# Altium PCB imx6_cpu_board.PcbDoc (part 2 of 9)
Units mil, origin at the board's own origin, x right, y up, seen from the top; angles counter-clockwise.
Board outline 2598.43 x 2362.2 mil, 8 copper layers (Top Layer, GND1, Signal Layer 1, POWER1, POWER2, Signal Layer 2, GND2, Bottom Layer), stack 66.304 mil thick; 354 components, 422 nets, 2180 pads, 1333 vias.
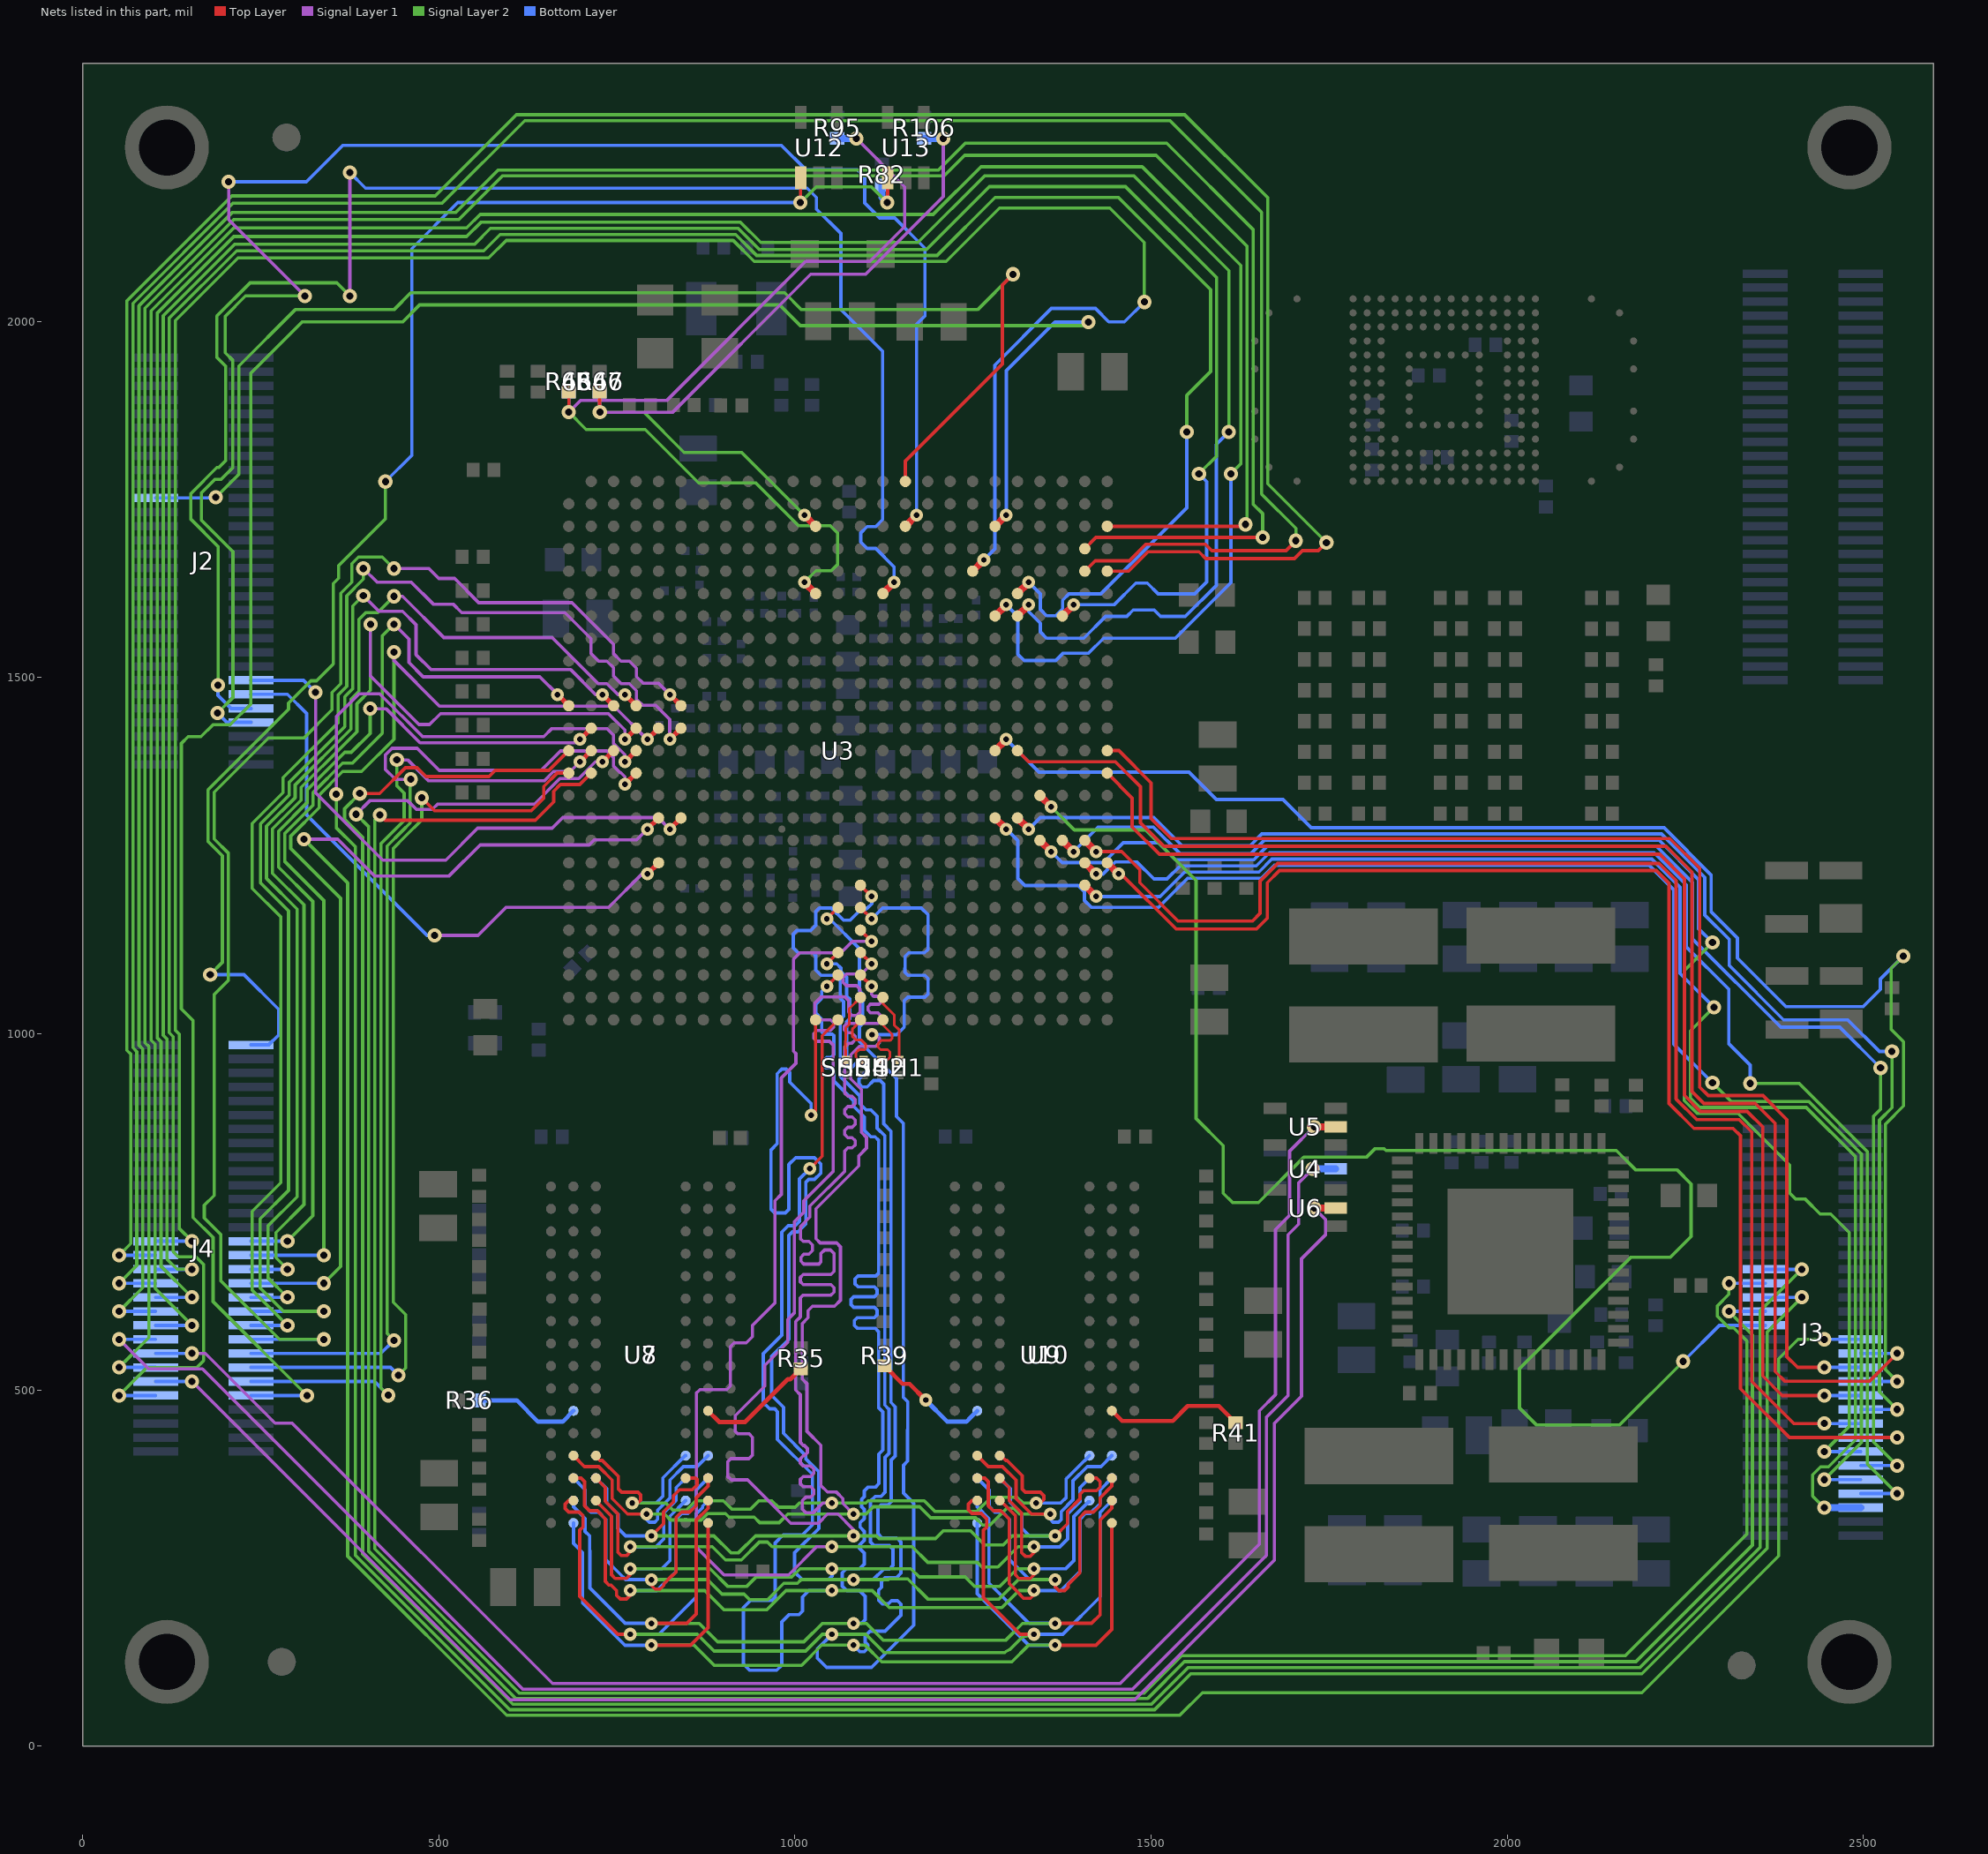
[diagram p8: the nets of this part, all layers, seen from the top]

## Part data
C1 C2 C3 C4 C5 C6 C7 C8 C9 C10 C11 C12 C13 C14 C15 C16 C17 C18 C19 C20 C21 C22 C23 C24 C25 C26 C27 C28 C29 C30 C31 C32 C33 C34 C35 C36 C37 C38 C39 C40 C41 C42 C43 C44 C45 C46 C47 C48 C49 C50 C51 C52 C53 C54 C55 C56 C57 C58 C59 C60 C61 C62 C63 C64 C65 C66 C67 C68 C69 C70 C71 C72 C73 C74 C75 C76 C77 C78 C79 C80 C81 C82 C83 C84 C85 C86 C87 C88 C89 C90 C91 C92 C93 C94 C95 C96 C97 C98 C99 C100 C101 C102 C103 C104 C105 C106 C107 C108 C109 C110 C111 C112 C113 C114 C115 C116 C117 C118 C119 C120 C121 C122 C123 C124 C125 C126 C127 C128 C129 C130 C131 C132 C133 C134 C135 C136 C137 C138 C139 C140 C141 C142 C143 C144 C145 C146 C147 C148 C149 C150 C151 C152 C153 C154 C155 C156 C157 C158 C159 C160 C161 C162 C163 C164 C165 C166 C167 C168 C169 C170 C171 C172 C173 C174 C175 C176 C177 C178 C179 C180 C181 C182 C183 C184 C185 C186 C187 C188 C189 C190 C191 C192 C193 C194 C195 C196 C197 C198 C199: library part Cap, "Capacitor"
D1: library part LN01401_1
D2: library part "Diode 11DQ03", "Schottky Rectifier"
J1 J2 J3 J4: library part "Header 30X2", "Header, 30-Pin, Dual row"
L1 L2: library part INDUCTOR, "IND PWR 1UH@100KHZ 2.65A 20% SMT"
L3 L4: library part INDUCTOR, "IND PWR 1UH@1MHZ 2A 30% SMT"
L5: library part Inductor, "Inductor"
R1 R2 R3 R4 R5 R6 R7 R8 R9 R10 R11 R12 R13 R14 R15 R16 R17 R18 R19 R20 R21 R22 R23 R24 R25 R26 R27 R28 R29 R30 R31 R32 R33 R34 R35 R36 R37 R38 R39 R40 R41 R42 R43 R44 R45 R46 R47 R48 R49 R50 R51 R52 R53 R54 R55 R56 R57 R58 R59 R60 R61 R62 R63 R64 R65 R66 R67 R68 R69 R70 R71 R72 R73 R74 R75 R76 R77 R78 R79 R80 R81 R82 R83 R84 R85 R86 R87 R88 R89 R90 R91 R92 R93 R94 R95 R96 R97 R98 R99 R100 R101 R102 R103 R104 R105 R106 R107 R108 R109 R110 R111 R112 R113 R114 R115 R116 R117 R118: library part Res3, "Resistor"
SH1 SH2 SH3 SH4: library part RES_SHORT-2, "ZERO OHM CUT TRACE 0201 PADS; NO PART TO ORDER"
U1: library part MMPF0100NPZES_56P, "IC POWER MANAGEMENT 2.8-4.5V QFN56"
U2 U14: library part STM6315
U3: library part PCIMX6Q6VV1A, "IC MCU MX6QUAD ARM CORTEX-A9 FCPBGA624"
U7 U8 U9 U10: library part 2G_DDR3_SDRAM_128MX16_96P, "IC MEM DDR3 SDRAM 2Gb 128MX16 1.35V FBGA96"
U11: library part SDIN5C2
Y1: library part XTAL_13Y_A, "XTAL 24MHZ -- 3.2X2.5MM SMT"
Y2: library part XTAL, "XTAL 32.768KHZ 12.5PF 20PPM 3.2X1.5MM SMT"

## Free pads (board coordinates)
  round 10 smd: EndPad(981.64,1287.1)
  round 118.11 hole 78.74: ""(118.11,118.11) ""(118.11,2244.09) ""(2480.32,118.11) ""(2480.32,2244.09)

## Via types
v1: diameter 18, hole 8, Top Layer to Bottom Layer, tented both sides, 768 vias
v2: diameter 20, hole 10, Top Layer to Bottom Layer, tented both sides, 565 vias

## Nets (pads, with @x,y where several pads share a name; then routed paths per layer and width w, separated by ;. In a path a pad name is that pad's centre, name@x,y a point inside that pad or via, vN(x,y) a via of type N, cw(c..) or ccw(c..) an arc to the next point about the centre after c; other vN are vias at no path point)
ACC: J3.29 U3.R22 | length 2296.9
  Top Layer w10: U3.R22@1343.84,1334.35 v1(1359.59,1318.6)
  Signal Layer 2 w4.5: v1(1359.59,1318.6) 1392.19,1286 1492,1286 1563,1215 1563,881 1601,843 1601,776.13 1614.29,762.84 1650.51,762.84 1714.23,826.56 1802.04,826.56 1813.81,838.34 1827.27,838.34 1829.61,836 2152.83,836 2179.83,809 2238,809 2258,789 2258,715.32 2229.02,686.34 2173.59,686.34 2017,529.76 2017,474.61 2040.61,451 2158,451 v2(2247,540)
  Bottom Layer w4.7: v2(2247,540) 2297.55,590.55 J3.29@2362.2,590.55
AUD3-RXD: J3.27 U3.N3 | length 3960.9
  Top Layer w7: v1(729.67,1381.59) U3.N3@745.42,1397.34
  Signal Layer 1 w4.5: v2(384,1308) 403,1327 456.25,1327 468.5,1314.75 490.73,1314.75 498.33,1322.35 634.12,1322.35 670.01,1358.25 696.39,1358.25 719.73,1381.59 v1(729.67,1381.59)
  Signal Layer 2 w4.5: v2(384,1308) 401.6,1290.4 401.6,273.24 608.24,66.6 1494.76,66.6 1546.71,118.55 2180.55,118.55 2344,282 2344,577.26 v2(2311.02,610.24)
  Bottom Layer w4.7: v2(2311.02,610.24) J3.27@2362.2,610.24
AUD3-TXC: J3.21 U3.N1 | length 4021.8
  Top Layer w4.7: v2(389,1337.19) 416.92,1337.19 453.08,1373.35 469.45,1373.35 482,1360.8 570.4,1360.8 579.1,1369.5 654.58,1369.5 U3.N1@682.43,1397.34
  Signal Layer 2 w4.5: v2(389,1337.19) 367.65,1315.84 367.65,1301.23 393,1275.88 393,269.68 603.88,58.8 1500.52,58.8 1551.82,110.1 2186.1,110.1 2355,279 2355,610.9 v2(2413.39,669.29)
  Bottom Layer w4.7: J3.21@2362.2,669.29 v2(2413.39,669.29)
AUD3-TXD: J3.23 U3.P2 | length 3902.3
  Top Layer w4.7: v2(417,1307) 424.2,1299.8 635.57,1299.8 661.11,1325.33 661.11,1340.21 670.7,1349.8 697.88,1349.8 U3.P2@713.92,1365.84
  Signal Layer 2 w4.5: v2(417,1307) 410.2,1300.2 410.2,276.8 612.6,74.4 1490.4,74.4 1543,127 2165.73,127 2336.2,297.47 2336.2,568.67 2317.75,587.12 2311.16,587.12 2294.77,603.5 2294.77,617.77 2311.02,634.02 v2(2311.02,649.61)
  Bottom Layer w4.7: v2(2311.02,649.61) J3.23@2362.2,649.61
AUD3-TXFS: J3.25 U3.N4 | length 4280
  Top Layer w7: v1(761.17,1381.59) U3.N4@776.92,1397.34
  Signal Layer 1 w4.5: v2(356,1336) 356,1445 388,1477 417.04,1477 477.2,1416.84 647.16,1416.84 658.66,1428.34 735.98,1428.34 744.92,1419.41 744.92,1407.77 761.17,1391.52 v1(761.17,1381.59)
  Signal Layer 2 w4.5: v2(356,1336) 356,1289 383,1262 383,267.51 599.51,51 1504.88,51 1555.53,101.65 2188.81,101.65 2365,277.84 2365,581.53 v2(2413.39,629.92)
  Bottom Layer w4.7: J3.25@2362.2,629.92 v2(2413.39,629.92)
AUD4-RXD: J3.56 U3.W24 | length 2057
  Top Layer w10: U3.W24@1406.84,1208.36 v1(1422.59,1192.61)
  Signal Layer 2 w4.5: v2(2290,1037) 2257,1004 2257,909.52 2270.02,896.5 2419.6,896.5 2488.49,827.61 2488.49,429.65 2450.71,391.86 2439.75,391.86 2428.63,380.75 2428.63,350.9 v2(2444.88,334.65)
  Bottom Layer w4.7: v1(1422.59,1192.61) 1512.61,1192.61 1546.9,1226.9 1651.24,1226.9 1669.34,1245 2202.84,1245 2242.5,1205.34 2242.5,1084.5 v2(2290,1037)
  Bottom Layer w10: v2(2444.88,334.65) J3.56@2496.06,334.65
AUD4-TXC: J3.50 U3.U22 | length 2024.7
  Top Layer w10: U3.U22@1343.84,1271.36 v1(1359.59,1255.61)
  Signal Layer 2 w4.5: v2(2524,951.91) 2524,894 2513.99,883.99 2513.99,426.95 v2(2547.24,393.7)
  Bottom Layer w4.7: v1(1359.59,1255.61) 1374.94,1240.26 1433.26,1240.26 1461,1268 1510,1268 1533.7,1244.3 1644.03,1244.3 1662.63,1262.9 2209.4,1262.9 2259.9,1212.4 2259.9,1133.05 2383.91,1009.04 2466.87,1009.04 v2(2524,951.91) ; J3.50@2496.06,393.7 v2(2547.24,393.7)
AUD4-TXD: J3.52 U3.T20 | length 2155.3
  Top Layer w10: U3.T20@1280.85,1302.85 v1(1296.6,1287.1)
  Signal Layer 2 w4.5: v2(2288,931) 2314,905 2423.05,905 2496.99,831.06 2496.99,426.13 v2(2444.88,374.02)
  Bottom Layer w4.7: v1(1296.6,1287.1) 1312.75,1270.95 1312.75,1217.75 1322.5,1208 1397.4,1208 1406.44,1198.97 1406.44,1187.05 1416.23,1177.26 1510.29,1177.26 1551.23,1218.2 1654.84,1218.2 1672.94,1236.3 2199.3,1236.3 2233.8,1201.8 2233.8,985.2 v2(2288,931) ; v2(2444.88,374.02) J3.52@2496.06,374.02
AUD4-TXFS: J3.54 U3.V24 | length 1970.6
  Top Layer w10: U3.V24@1406.84,1239.86 v1(1422.59,1224.11)
  Signal Layer 2 w4.5: v2(2341,930.18) 2409.82,930.18 2505.49,834.51 2505.49,396.08 v2(2547.24,354.33)
  Bottom Layer w4.7: v1(1422.59,1224.11) 1432.37,1224.11 1449.26,1241 1480,1241 1503.88,1217.12 1522.14,1217.12 1540.62,1235.6 1647.63,1235.6 1666.23,1254.2 2205.87,1254.2 2251.2,1208.87 2251.2,1122 2311.02,1062.18 2311.02,985.75 2341,955.77 v2(2341,930.18) ; J3.54@2496.06,354.33 v2(2547.24,354.33)
AUD5-RXD: J3.48 U3.U23 | length 1999
  Top Layer w10: U3.U23@1375.34,1271.36 v1(1391.09,1255.61)
  Signal Layer 2 w4.5: v2(2288,1128) 2248.5,1088.5 2248.5,906 2266.5,888 2324,888 2396.45,815.55 2396.45,776.27 2405,767.72 2418.28,767.72 2439,747 2454,747 2479.99,721.01 ; v2(2444.88,413.39) 2479.99,448.5 2479.99,721.01 ; 2480.04,720.96 2479.99,721.01
  Bottom Layer w4.7: v1(1391.09,1255.61) 1425.48,1290 1503,1290 1540,1253 1640.43,1253 1659.03,1271.6 2212.93,1271.6 2268.6,1215.93 2268.6,1147.4 v2(2288,1128) ; v2(2444.88,413.39) J3.48@2496.06,413.39
AUD5-TXC: J3.42 U3.T21 | length 2014.2
  Top Layer w10: U3.T21@1312.35,1302.85 v1(1328.1,1287.1)
  Signal Layer 2 w4.5: v2(2540,975) 2540.2,974.8 2540.2,896.2 2522.49,878.49 2522.49,497.19 v2(2547.24,472.44)
  Bottom Layer w4.7: v1(1328.1,1287.1) 1344.25,1303.25 1503.75,1303.25 1543,1264 1639.12,1264 1655.42,1280.3 2216.47,1280.3 2277.3,1219.47 2277.3,1166.34 2311.64,1132 2311.64,1095.55 2387.8,1019.39 2478,1019.39 2522.39,975 v2(2540,975) ; J3.42@2496.06,472.44 v2(2547.24,472.44)
AUD5-TXD: J3.44 U3.U24 | length 1917.3
  Top Layer w4.7: v1(1422.59,1255.61) 1458.72,1255.61 1484,1230.33 1484,1212 1538,1158 1642,1158 1653,1169 1653,1214.3 1677.7,1239 2213,1239 2237,1215 2237,908.4 2265.9,879.5 2325.5,879.5 2343,862 2343,512 2402.24,452.76 v2(2444.88,452.76)
  Top Layer w10: U3.U24@1406.84,1271.36 v1(1422.59,1255.61)
  Bottom Layer w4.7: v2(2444.88,452.76) J3.44@2496.06,452.76
AUD5-TXFS: J3.46 U3.V25 | length 1980.5
  Top Layer w4.7: v1(1454.08,1224.11) 1457.89,1224.11 1535,1147 1648,1147 1663,1162 1663,1212 1680,1229 2209,1229 2227,1211 2227,902 2261.93,867.07 2316.93,867.07 2327.37,856.63 2327.37,501.63 2395.93,433.07 v2(2547.24,433.07)
  Top Layer w10: U3.V25@1438.33,1239.86 v1(1454.08,1224.11)
  Bottom Layer w4.7: J3.46@2496.06,433.07 v2(2547.24,433.07)
AUD6-RXD: J3.40 U3.P25 | length 1826.3
  Top Layer w4.7: U3.P25@1438.33,1365.84 1473.38,1330.79 1473.38,1290 1511.6,1251.78 2214,1251.78 2248.5,1217.28 2248.5,913.5 2271,891 2336.69,891 2358.5,869.19 2358.5,519.5 2385.87,492.13 v2(2444.88,492.13)
  Bottom Layer w4.7: v2(2444.88,492.13) J3.40@2496.06,492.13
AUD6-TXC: J3.34 U3.N21 | length 2083.2
  Top Layer w4.7: U3.N21@1312.35,1397.34 1328.1,1381.59 1450,1381.59 1485,1346.59 1485,1296 1518,1263 2223,1263 2259.1,1226.9 2259.1,918.68 2275.78,902 2348,902 2376,874 2376,525.84 2389.84,512 2508.06,512 v2(2547.24,551.18)
  Bottom Layer w4.7: J3.34@2496.06,551.18 v2(2547.24,551.18)
AUD6-TXD: J3.36 U3.N25 | length 1820.5
  Top Layer w4.7: U3.N25@1438.33,1397.34 1454.61,1397.34 1500,1351.95 1500,1302.14 1528.14,1274 2228,1274 2270,1232 2270,925 2282,913 2359,913 2392.5,879.5 2392.5,546.5 2407.5,531.5 v2(2444.88,531.5)
  Bottom Layer w4.7: v2(2444.88,531.5) J3.36@2496.06,531.5
AUD6-TXFS: J3.38 U3.N20 | length 2201.7
  Top Layer w10: U3.N20@1280.85,1397.34 v1(1296.6,1413.09)
  Signal Layer 2 w4.5: v2(2547.24,511.81) 2530.99,528.06 2530.99,873.35 2556.2,898.55 2556.2,988.6 2538.8,1006 2538.8,1091.8 v2(2556,1109)
  Bottom Layer w4.7: v1(1296.6,1413.09) 1342.69,1367 1553,1367 1591.33,1328.67 1685.15,1328.67 1724.82,1289 2220,1289 2286,1223 2286,1171.34 2323,1134.34 2323,1106 2391,1038 2499.49,1038 2523.65,1062.15 2523.65,1076.65 v2(2556,1109) ; J3.38@2496.06,511.81 v2(2547.24,511.81)
AUD-MCLK: J3.32 U3.T5 | length 4182
  Top Layer w7: v1(792.66,1287.1) U3.T5@808.41,1302.85
  Signal Layer 1 w4.5: v2(310.58,1273) 358,1273 409.5,1221.5 514.49,1221.5 557.92,1264.93 711.08,1264.93 718,1271.85 777.41,1271.85 v1(792.66,1287.1)
  Signal Layer 2 w4.5: v2(310.58,1273) 372,1211.58 372,266.49 595.29,43.2 1540.2,43.2 1572,75 2189,75 2381,267 2381,543.7 2408.17,570.87 v2(2444.88,570.87)
  Bottom Layer w4.7: v2(2444.88,570.87) J3.32@2496.06,570.87
BM-SEL: J4.2 R82.2 U12.1 U13.1 | length 2164.7
  Top Layer w4.7: v2(1007.5,2166.6) 1007.88,2166.98 U12.1@1007.88,2201.29 ; v2(1129.55,2166.6) 1129.92,2166.98 U13.1@1129.92,2201.29
  Signal Layer 2 w4.5: v2(179,1083) 196.12,1100.12 196.12,1249.7 176,1269.82 176,1342.29 289,1455.29 289,1464.22 320.18,1495.4 328.4,1495.4 352,1519 352,1632.04 359.45,1639.49 359.45,1657.05 425,1722.6 v2(425,1775) ; v2(1007.5,2166.6) 1029.45,2188.55 1107.6,2188.55 v2(1129.55,2166.6)
  Bottom Layer w4.7: v2(179,1083) 226.34,1083 275,1034.34 275,998.19 261.06,984.25 J4.2@236.22,984.25 ; v2(425,1775) 462,1812 462,2102 526.6,2166.6 v2(1007.5,2166.6)
  Bottom Layer w10: R82.2@1122,2191.48 1122,2174.15 v2(1129.55,2166.6)
BOOT-MODE0: R47.1 R66.2 R106.1 U3.C12 | length 1141.9
  Top Layer w4.5: v2@725.78,1872.67 v2(726,1872.45)
  Top Layer w4.7: v2@725.78,1872.67 R47.1@725.78,1900.59
  Top Layer w10: v1(1013.13,1728.05) U3.C12@1028.88,1712.3
  Signal Layer 1 w4.5: v2(726,1872.45) 828.5,1872.45 1022.05,2066 1099.08,2066 1208.11,2175.03 v2(1208.11,2256.77)
  Signal Layer 2 w4.5: v2(726,1872.45) 787.91,1872.45 844.36,1816 925.18,1816 v1(1013.13,1728.05)
  Bottom Layer w4.7: R66.2@725.78,1900.59 725.78,1872.67 v2(726,1872.45)
  Bottom Layer w10: R106.1@1181.12,2256.77 v2(1208.11,2256.77)
BOOT-MODE1: R46.1 R65.2 R95.1 U3.F12 | length 1385.9
  Top Layer w4.5: v2(682.43,1872.45) v2@682.48,1872.5
  Top Layer w4.7: v2@682.48,1872.5 R46.1@682.48,1900.59
  Top Layer w10: v1(1013.13,1633.56) U3.F12@1028.88,1617.81
  Signal Layer 1 w4.5: v2(682.43,1872.45) 698.73,1888.75 819.75,1888.75 1015,2084 1104.85,2084 1154,2133.15 1154,2188.83 v2(1086.07,2256.77)
  Signal Layer 2 w4.5: v2(682.43,1872.45) 706.88,1848 789.8,1848 864.8,1773 945,1773 1005.15,1712.85 1049.82,1712.85 1059.98,1702.69 1059.98,1658.92 1050.93,1649.86 1029.43,1649.86 v1(1013.13,1633.56)
  Bottom Layer w4.7: v2(682.43,1872.45) 682.48,1872.5 R65.2@682.48,1900.59
  Bottom Layer w10: R95.1@1059.07,2256.77 v2(1086.07,2256.77)
CAN-RX: J2.50 U3.V5 | length 838
  Top Layer w7: v1(792.66,1224.11) U3.V5@808.41,1239.86
  Signal Layer 1 w4.5: v2(494,1138) 555,1138 594.37,1177.37 738.37,1177.37 785.11,1224.11 v1(792.66,1224.11)
  Bottom Layer w4.7: J2.50@236.22,1476.38 287.4,1476.38 314.3,1449.48 314.3,1307 483.3,1138 v2(494,1138)
CAN-STBY: J2.52 U3.F15 | length 2333
  Top Layer w10: U3.F15@1123.37,1617.81 v1(1139.12,1633.56)
  Signal Layer 1 w4.5: v2(375,2035.65) v2(375,2209)
  Signal Layer 2 w4.5: v2(190,1489) 190,1684 152,1722 152,1758.44 188.33,1794.77 191.23,1794.77 200.75,1804.29 200.75,1937 188.5,1949.25 188.5,2007.45 235.05,2054 356.65,2054 v2(375,2035.65)
  Bottom Layer w4.7: v2(190,1489) 190,1475 208.62,1456.38 J2.52@236.54,1456.38 ; v2(375,2209) 397.1,2186.9 1017.1,2186.9 1030.13,2173.87 1030.13,2157.64 1064.37,2123.4 1064.37,2016.63 1122.98,1958.02 1122.98,1721.69 1113.19,1711.9 1101.27,1711.9 1092.28,1702.91 1092.28,1690.19 1101.27,1681.2 1113.2,1681.2 1139.12,1655.28 v1(1139.12,1633.56)
CAN-TX: J2.48 U3.T6 | length 828.9
  Top Layer w7: v1(824.16,1287.1) U3.T6@839.91,1302.85
  Signal Layer 1 w4.5: v2(326.91,1479.15) 326.91,1337.95 421.11,1243.75 509.75,1243.75 554.5,1288.5 659.15,1288.5 674,1303.35 807.91,1303.35 v1(824.16,1287.1)
  Bottom Layer w4.7: J2.48@236.22,1496.06 310,1496.06 v2(326.91,1479.15)
CAN-TXEN: J2.54 U3.C16 | length 2474.8
  Top Layer w10: U3.C16@1154.87,1712.3 v1(1170.62,1728.05)
  Signal Layer 1 w4.5: v2(204.88,2196) 204.88,2142.77 v2(312,2035.65)
  Signal Layer 2 w4.5: v2(189.07,1450) 211,1471.93 211,1676.64 166.46,1721.18 166.46,1758.96 185.5,1778 194.18,1778 210.85,1794.67 210.85,1945.15 200,1956 200,2007 228.65,2035.65 v2(312,2035.65)
  Bottom Layer w4.7: v2(189.07,1450) 202.06,1437.01 J2.54@236.22,1437.01 ; v2(204.88,2196) 314,2196 365,2247 980.88,2247 1014.88,2213 1087,2213 1098,2202 1098,2166 1119,2145 1140,2145 1182.38,2102.62 1182.38,2007.65 1170.62,1995.89 v1(1170.62,1728.05)
CAP-TCH-INT0: J2.21 U3.A16 | length 1795.7
  Top Layer w4.7: U3.A16@1154.87,1775.29 1154.87,1803.75 1291,1939.89 1291,2051.03 v2(1306,2066.03)
  Signal Layer 2 w4.5: v2(187,1753) 219.3,1785.3 219.3,1937.3 298.37,2016.37 437,2016.37 460.63,2040 985.37,2040 1009,2016.37 1256.34,2016.37 v2(1306,2066.03)
  Bottom Layer w4.7: J2.21@102.36,1751.97 185.97,1751.97 v2(187,1753)
CSI0-DAT12: J4.30 U3.M2 | length 1230.7
  Top Layer w7: v1(698.17,1413.09) U3.M2@713.92,1428.84
  Signal Layer 1 w4.5: v2(403.5,1456.25) 425.77,1456.25 473.68,1408.34 693.42,1408.34 v1(698.17,1413.09)
  Signal Layer 2 w4.5: v2(287.4,708.66) 323,744.26 323,1185.76 275,1233.76 275,1284.23 315.11,1324.34 315.11,1342.13 367.98,1395 377,1395 403.5,1421.5 v2(403.5,1456.25)
  Bottom Layer w4.7: J4.30@236.22,708.66 v2(287.4,708.66)
CSI0-DAT13: J4.32 U3.L1 | length 1394.8
  Top Layer w7: v1(666.68,1476.08) U3.L1@682.43,1460.33
  Signal Layer 1 w4.5: v2(437,1574.8) 458,1553.8 458,1521 478,1501 641.76,1501 v1(666.68,1476.08)
  Signal Layer 2 w4.5: v2(338.58,688.98) 338.58,1186.92 283.5,1242 283.5,1280.78 323.56,1320.84 323.56,1338.56 364.84,1379.84 378.84,1379.84 420.75,1421.75 420.75,1558.55 v2(437,1574.8)
  Bottom Layer w4.7: J4.32@236.22,688.98 v2(338.58,688.98)
CSI0-DAT14: J4.34 U3.M4 | length 1564.4
  Top Layer w7: v1(761.17,1413.09) U3.M4@776.92,1428.84
  Signal Layer 1 w4.5: v2(404,1574.8) 404,1502.06 472.06,1434 487,1434 502.34,1449.34 738.04,1449.34 761.17,1426.21 v1(761.17,1413.09)
  Signal Layer 2 w4.5: v2(287.4,669.29) 271.2,685.49 271.2,720.8 310.58,760.18 310.58,1180.92 266.5,1225 266.5,1287.68 306.66,1327.84 306.66,1345.7 364.46,1403.5 364.54,1403.5 384.98,1423.94 384.98,1463.04 404,1482.06 v2(404,1574.8)
  Bottom Layer w4.7: J4.34@236.22,669.29 v2(287.4,669.29)
CSI0-DAT15: J4.36 U3.M5 | length 1538
  Top Layer w7: v1(792.66,1413.09) U3.M5@808.41,1428.84
  Signal Layer 1 w4.5: v2(437,1535.43) 437,1523.76 500.92,1459.84 745.91,1459.84 v1(792.66,1413.09)
  Signal Layer 2 w4.5: v2(338.58,649.61) 362,673.02 362,1190 292,1260 292,1277.33 332.01,1317.34 332.01,1334.99 365.02,1368 391.61,1368 437,1413.39 v2(437,1535.43)
  Bottom Layer w4.7: J4.36@236.22,649.61 v2(338.58,649.61)
CSI0-DAT16: J4.38 U3.L4 | length 1568.9
  Top Layer w7: v1(761.17,1476.08) U3.L4@776.92,1460.33
  Signal Layer 1 w4.5: v2(437,1614) 449,1614 507,1556 659,1556 723.67,1491.33 735.98,1491.33 751.23,1476.08 v1(761.17,1476.08)
  Signal Layer 2 w4.5: v2(287.4,629.92) 260,657.32 260,730 301,771 301,1175 258,1218 258,1291.13 298.21,1331.34 298.21,1349.27 376.48,1427.54 376.48,1469.42 387.75,1480.69 387.75,1581.53 397.27,1591.05 414.05,1591.05 v2(437,1614)
  Bottom Layer w4.7: J4.38@236.22,629.92 v2(287.4,629.92)
CSI0-DAT17: J4.40 U3.L3 | length 1710.4
  Top Layer w7: v1(729.67,1476.08) U3.L3@745.42,1460.33
  Signal Layer 1 w4.5: v2(394,1615) 416,1593 449,1593 468,1574 468,1532 488.67,1511.33 684.67,1511.33 719.92,1476.08 v1(729.67,1476.08)
  Signal Layer 2 w4.5: v2(338.58,610.24) 281.76,610.24 249,643 249,740 289,780 289,1172.18 249.5,1211.68 249.5,1294.58 289.76,1334.84 289.76,1352.84 367.98,1431.06 367.98,1472.94 379.25,1484.21 379.25,1600.25 v2(394,1615)
  Bottom Layer w4.7: J4.40@236.22,610.24 v2(338.58,610.24)
CSI0-DAT18: J4.42 U3.M6 | length 1825.9
  Top Layer w7: v1(824.16,1413.09) U3.M6@839.91,1428.84
  Signal Layer 1 w4.5: v2(394,1653) 413,1634 461,1634 492,1603 520,1603 531.93,1591.07 676.93,1591.07 713.42,1554.58 713.42,1533.76 724.34,1522.83 735.98,1522.83 745,1513.82 745,1502.19 755.85,1491.33 767.48,1491.33 777.41,1481.41 777.41,1469.76 786.34,1460.83 804.4,1460.83 824.16,1441.07 v1(824.16,1413.09)
  Signal Layer 2 w4.5: v2(287.4,590.55) 238,639.95 238,750.65 278,790.65 278,1164 238,1204 238,1295.03 281.31,1338.34 281.31,1359.28 358.5,1436.47 358.5,1475.48 370.75,1487.73 370.75,1614.73 394,1637.98 v2(394,1653)
  Bottom Layer w4.7: J4.42@236.22,590.55 v2(287.4,590.55)
CSI0-DAT19: J4.44 U3.L6 | length 1996.1
  Top Layer w7: v1(824.16,1476.08) U3.L6@839.91,1460.33
  Signal Layer 1 w4.5: v2(437,1653) 486,1653 500,1639 522,1639 556,1605 687,1605 744.92,1547.08 744.92,1533.76 755.84,1522.83 767.48,1522.83 777.41,1512.91 777.41,1501.25 786.51,1492.15 808.1,1492.15 v1(824.16,1476.08)
  Signal Layer 2 w4.5: v2(338.58,570.87) 276.13,570.87 194,653 194,718.02 170.72,741.3 170.72,759.15 184.5,772.93 184.5,1055 204.62,1075.12 204.62,1253.22 184.5,1273.34 184.5,1338.84 260.95,1415.28 310.58,1415.28 350,1454.7 350,1479 362.25,1491.25 362.25,1618.25 377.75,1633.75 377.75,1659.73 387.27,1669.25 420.75,1669.25 v2(437,1653)
  Bottom Layer w4.7: J4.44@236.22,570.87 v2(338.58,570.87)
CSI0-HSYNCH: J4.46 U3.P4 | length 1494.3
  Top Layer w7: v1(761.17,1350.09) U3.P4@776.92,1365.84
  Signal Layer 1 w4.5: v2(460.52,1357) 439,1357 424.75,1371.25 424.75,1391.12 434.27,1400.64 469.36,1400.64 500.4,1369.6 643.64,1369.6 670.88,1396.84 735.98,1396.84 744.92,1387.91 744.92,1376.27 754.85,1366.34 755.52,1366.34 761.17,1360.69 v1(761.17,1350.09)
  Signal Layer 2 w4.5: v2(437,569.59) 427.3,579.29 427.3,1263.3 448.75,1284.75 459.75,1295.73 459.75,1356.23 v2(460.52,1357)
  Bottom Layer w4.7: J4.46@236.22,551.18 418.59,551.18 v2(437,569.59)
CSI0-PIXCLK: J4.48 U3.P1 | length 1295.2
  Top Layer w4.7: v2(476,1331) 493.98,1313.02 629.6,1313.02 647.29,1330.71 647.29,1346.99 666.14,1365.84 U3.P1@682.43,1365.84
  Signal Layer 2 w4.5: v2(443,520.45) 453.25,530.7 453.25,605.75 436,623 436,1259.98 452.27,1276.25 ; 452.29,1276.25 476,1299.96 v2(476,1331)
  Bottom Layer w4.7: J4.48@236.22,531.5 431.96,531.5 v2(443,520.45)
CSI0-RST-B: J4.52 U3.C20 | length 3250
  Top Layer w10: U3.C20@1280.85,1712.3 v1(1296.6,1728.05)
  Signal Layer 2 w4.5: v2(314.75,492.13) 183,623.88 183,714 155,742 155,1018.51 138.5,1035.01 138.5,1407.34 148,1416.84 165.99,1416.84 182.95,1433.8 207,1433.8 236.2,1463 236.2,1927.38 308.2,1999.37 449.37,1999.37 473,2023 978.33,2023 1007.37,1993.96 1406.96,1993.96 v2(1412,1999)
  Bottom Layer w4.7: J4.52@236.22,492.13 v2(314.75,492.13) ; v1(1296.6,1728.05) 1296.6,1930.6 1365,1999 v2(1412,1999)
CSI0-VSYNCH: J4.50 U3.N2 | length 1417.5
  Top Layer w7: v1(698.17,1381.59) U3.N2@713.92,1397.34
  Signal Layer 1 w4.5: v2(441,1384.39) 456.11,1384.39 485.65,1354.85 647.85,1354.85 661,1368 684.57,1368 v1(698.17,1381.59)
  Signal Layer 2 w4.5: v2(429,492.38) 418.8,502.58 418.8,1266.82 451.25,1299.27 451.25,1337.75 441,1348 v2(441,1384.39)
  Bottom Layer w4.7: J4.50@236.22,511.81 409.56,511.81 v2(429,492.38)
CSI1-DAT12: J4.33 U3.G23 | length 3727.1
  Top Layer w10: U3.G23@1375.34,1586.32 v1(1391.08,1602.07)
  Signal Layer 2 w4.5: v2(153.54,669.29) 132.71,669.29 118.5,683.5 118.5,992.35 113,997.85 113,2007.9 213.1,2108 550,2108 572.5,2130.5 920.08,2130.5 949.58,2101 1185,2101 1273,2189 1464,2189 1592,2061 1592,1811 v2(1567,1786)
  Bottom Layer w4.7: J4.33@102.36,669.29 v2(153.54,669.29) ; v1(1391.08,1602.07) 1448,1602.07 1478.39,1632.46 1494.66,1632.46 1509.77,1617.35 1561.35,1617.35 1578,1634 1578,1775 v2(1567,1786)
CSI1-DAT13: J4.31 U3.E25 | length 4008.2
  Top Layer w4.7: U3.E25@1438.33,1649.31 1468.38,1649.31 1495.6,1676.53 1567,1676.53 1576.53,1667 1701.31,1667 1712.32,1678.01 1734.56,1678.01 v2(1746,1689.45)
  Signal Layer 2 w4.5: v2(51.18,688.98) 67.43,705.23 67.43,971.3 62,976.73 62,2028.6 209.4,2176 495,2176 609,2290 1547,2290 1663.5,2173.5 1663.5,1771.95 v2(1746,1689.45)
  Bottom Layer w4.7: v2(51.18,688.98) J4.31@102.36,688.98
CSI1-DAT14: J4.35 U3.E24 | length 3985.6
  Top Layer w4.7: U3.E24@1406.84,1649.31 1421.53,1664 1469.57,1664 1492.57,1687 1576,1687 1585,1678 1689.19,1678 v2(1703.19,1692)
  Signal Layer 2 w4.5: v2(51.18,649.61) 75.93,674.36 75.93,974.82 70.5,980.25 70.5,2025.15 211.35,2166 505,2166 620.55,2281.55 1526.45,2281.55 1655,2153 1655,1757.47 1703.19,1709.28 v2(1703.19,1692)
  Bottom Layer w4.7: v2(51.18,649.61) J4.35@102.36,649.61
CSI1-DAT15: J4.41 U3.G20 | length 4068
  Top Layer w10: U3.G20@1280.85,1586.32 v1(1296.6,1602.07)
  Signal Layer 2 w4.5: v2(153.54,590.55) 101.5,642.59 101.5,985.31 96,990.81 96,2014.8 212.2,2131 538.98,2131 557.98,2150 1194,2150 1261,2217 1487.34,2217 1626,2078.34 1626,1800 v2(1612,1786)
  Bottom Layer w4.7: J4.41@102.36,590.55 v2(153.54,590.55) ; v1(1296.6,1602.07) 1312.74,1585.93 1312.74,1532.71 1321.73,1523.72 1365.95,1523.72 1376.41,1534.19 1412.22,1534.19 1433.26,1555.22 1533.99,1555.22 1612,1633.23 v2(1612,1786)
CSI1-DAT16: J4.37 U3.G21 | length 3920.5
  Top Layer w10: U3.G21@1312.35,1586.32 v1(1328.09,1602.07)
  Signal Layer 2 w4.5: v2(153.54,629.92) 110,673.46 110,988.83 104.5,994.33 104.5,2011.35 212.15,2119 539,2119 559,2139 923.53,2139 951.86,2110.67 1172.67,2110.67 1266,2204 1476.15,2204 1609,2071.15 v2(1609,1844.81)
  Bottom Layer w4.7: J4.37@102.36,629.92 v2(153.54,629.92) ; v1(1328.09,1602.07) 1328.09,1592.28 1344.24,1576.13 1344.24,1564.21 1353.23,1555.22 1405.3,1555.22 1436,1585.92 1465.92,1585.92 1474.72,1594.72 1504.28,1594.72 1513.08,1585.92 1547.92,1585.92 1591.33,1629.33 1591.33,1827.14 v2(1609,1844.81)
CSI1-DAT17: J4.39 U3.D24 | length 3881.7
  Top Layer w4.7: U3.D24@1406.84,1680.8 1422.59,1696.55 v2(1656.55,1696.55)
  Signal Layer 2 w4.5: v2(51.18,610.24) 84.43,643.49 84.43,978.34 79,983.77 79,2021.7 210.3,2153 524,2153 583.5,2212.5 1201.5,2212.5 1239,2250 1522,2250 1643,2129 1643,1743.55 1656.55,1730 v2(1656.55,1696.55)
  Bottom Layer w4.7: v2(51.18,610.24) J4.39@102.36,610.24
CSI1-DAT18: J4.47 U3.C25 | length 3833
  Top Layer w4.7: U3.C25@1438.33,1712.3 1630,1712.3 v2(1632.59,1714.9)
  Signal Layer 2 w4.5: v2(51.18,531.5) 93,573.31 93,981.79 87.5,987.29 87.5,2018.25 212.25,2143 528,2143 589,2204 1209,2204 1238,2233 1507,2233 1634.5,2105.5 1634.5,1716.8 v2(1632.59,1714.9)
  Bottom Layer w4.7: v2(51.18,531.5) J4.47@102.36,531.5
CSI1-DAT19: J4.43 U4.2 | length 2544.6
  Signal Layer 1 w4.5: v2(51.18,570.87) 92.63,529.41 168.08,529.41 617.49,80 1474,80 1662,268 1662,462 1692,492 1692,717.75 1707,732.75 1707,790.64 v2(1726.68,810.31)
  Bottom Layer w4.7: v2(51.18,570.87) J4.43@102.36,570.87
  Bottom Layer w10: v2(1726.68,810.31) U4.2@1758.99,810.31
CSI1-HSYNCH: J4.45 U5.2 | length 2470.7
  Top Layer w10: v2(1728.74,869.38) U5.2@1758.99,869.38
  Signal Layer 1 w4.5: v2(153.54,551.18) 172.16,551.18 270,453.34 294.05,453.34 659.59,87.8 1456.48,87.8 1652,283.32 1652,470.76 1674.58,493.34 1674.58,725 1694.4,744.82 1694.4,835.04 v2(1728.74,869.38)
  Bottom Layer w4.7: J4.45@102.36,551.18 v2(153.54,551.18)
CSI1-PIXCLK: J4.51 U3.F21 | length 3964.7
  Top Layer w10: U3.F21@1312.35,1617.81 v1(1328.1,1633.56)
  Signal Layer 2 w4.5: v2(51.18,492.13) 90.55,531.5 131.1,531.5 160.29,531.5 169.79,541 169.79,676.02 158.88,686.93 134.07,686.93 127,694 127,995.87 121.5,1001.37 121.5,2004.45 216.05,2099 563,2099 586,2122 916.63,2122 946.13,2092.5 1199.5,2092.5 1281,2174 1454,2174 1583.5,2044.5 1583.5,1929.5 1550,1896 v2(1550,1844.81)
  Bottom Layer w4.7: v2(51.18,492.13) J4.51@102.36,492.13 ; v1(1328.1,1633.56) 1344.24,1617.42 1344.24,1595.71 1353.23,1586.72 1365.95,1586.72 1375.73,1596.5 1375.73,1608.43 1384.72,1617.42 1429.42,1617.42 1550,1738 v2(1550,1844.81)
CSI1-RST-B: J4.29 U3.E19 | length 3471.3
  Top Layer w10: U3.E19@1249.36,1649.31 v1(1265.11,1665.06)
  Signal Layer 2 w4.5: v2(153.54,708.66) 135.5,726.7 135.5,999.39 130,1004.89 130,1019 130,2001 218,2089 570,2089 594.5,2113.5 913.18,2113.5 942.68,2084 1212,2084 1287,2159 1442,2159 1490.38,2110.62 v2(1490.38,2027.16)
  Bottom Layer w4.7: J4.29@102.36,708.66 v2(153.54,708.66) ; v1(1265.11,1665.06) 1280.46,1680.41 1280.46,1938.46 1360,2018 1421.81,2018 1440.57,1999.23 1462.45,1999.23 v2(1490.38,2027.16)
CSI1-VSYNCH: J4.49 U6.2 | length 2397.9
  Top Layer w10: v2(1728.74,755.21) U6.2@1758.99,755.21
  Signal Layer 1 w4.5: v2(153.54,511.81) 600.35,65 1477,65 1673,261 1673,453 1711,491 1711,684 1744.99,717.99 1744.99,738.96 v2(1728.74,755.21)
  Bottom Layer w4.7: J4.49@102.36,511.81 v2(153.54,511.81)
DDR_SDCLK0: SH1.1 U3.AD15 | length 97.6
  Top Layer w3.7: U3.AD15@1123.37,1050.88 1123.37,1042.35 1139.12,1026.6 1139.12,1012.34 1146.38,1005.08 SH1.1@1146.38,962.85
DDR_SDCLK0_B: SH2.1 U3.AE15 | length 99.9
  Top Layer w3.7: SH2.1@1121.38,962.85 1129.38,962.85 1133.14,966.61 1133.14,974.58 1130.08,977.64 1120.1,977.64 1116.38,981.36 1116.38,985.88 1120.84,990.34 1133.38,990.34 1136.38,993.34 1136.38,999.34 1123.37,1012.35 U3.AE15@1123.37,1019.39
DDR_SDCLK1: SH3.1 U3.AD14 | length 97.4
  Top Layer w3.7: SH3.1@1071.38,962.85 1071.38,977.34 1070.38,978.34 1070.38,989.34 1071.38,990.34 1071.38,1008.12 1076.13,1012.86 1076.13,1035.14 U3.AD14@1091.88,1050.88
DDR_SDCLK1_B: SH4.1 U3.AE14 | length 92.3
  Top Layer w3.7: U3.AE14@1091.88,1019.39 1091.88,1018.17 1083.83,1010.12 1083.83,1009.66 1080.38,1006.21 1080.38,996.34 1085.38,991.34 1092.72,991.34 1099.38,984.68 1099.38,979.34 1097.38,977.34 1089.62,977.34 1085.38,973.1 1085.38,967.09 1089.62,962.85 SH4.1@1096.38,962.85
DRAM0_ZQ: R35.2 U8.L8 | length 167.6
  Top Layer w6: U8.L8@877.93,470.61 893.69,454.85 929.88,454.85 989.95,514.92 993.44,514.92 R35.2@1008.1,529.58
DRAM1_ZQ: R36.2 U7.L8 | length 150.6
  Bottom Layer w6: R36.2@557.14,485.34 609.38,485.34 639.38,455.34 673.7,455.34 U7.L8@688.96,470.61
DRAM2_ZQ: R41.2 U10.L8 | length 197.7
  Top Layer w6: U10.L8@1444.86,470.61 1459.08,456.4 1530.34,456.4 1551.29,477.34 1595.14,477.34 R41.2@1618.38,454.1
DRAM3_ZQ: R39.2 U9.L8 | length 168.9
  Top Layer w6: R39.2@1125.7,533.58 1150.94,508.34 1160.84,508.34 v1(1183.38,485.8)
  Bottom Layer w6: v1(1183.38,485.8) 1213.84,455.34 1240.38,455.34 1246.68,461.64 1246.93,461.64 U9.L8@1255.89,470.61
DRAM_A0: U3.AC14 U7.N3 U8.N3 U9.N3 U10.N3 | length 2366.3
  Top Layer w4.7: U8.N3@720.45,407.62 720.46,406.53 725.95,401.04 729.37,401.04 752.08,378.33 752.08,360.71 756.45,356.34 779.38,356.34 783.1,352.62 783.1,344.81 779.38,341.09 v1(771.45,341.09) ; U3.AC14@1091.88,1082.38 v1(1107.62,1066.63) ; U10.N3@1287.38,407.62 1289.12,407.61 1295.69,401.04 1297.61,401.04 1319.01,379.64 1319.01,360.71 1323.38,356.34 1344.38,356.34 1349.38,351.34 1349.38,346.09 1344.38,341.09 v1(1338.38,341.09)
  Signal Layer 1 w4.5: v1(1051.88,341.09) 1039.13,341.09 1025.38,327.34 1015.38,327.34 1010.38,332.34 1010.38,344.47 1015.38,349.47 1022.13,349.47 1026.38,353.72 1026.38,359.72 1022.13,363.97 1011.63,363.97 1007.38,368.22 1007.38,374.22 1011.63,378.47 1022.13,378.47 1026.38,382.72 1026.38,388.72 1022.13,392.97 1011.63,392.97 1007.38,397.22 1007.38,403.22 1011.63,407.47 1013.13,407.47 1017.38,411.72 1017.38,417.72 1013.13,421.97 1011.63,421.97 1007.38,426.22 1007.38,493.34 1000.94,499.78 1000.94,595.91 1007.38,602.34 1007.38,629.09 1011.38,633.09 1050.61,633.09 1054.86,637.34 1054.86,643.34 1050.61,647.59 1011.63,647.59 1007.38,651.84 1007.38,657.84 1011.63,662.09 1050.61,662.09 1054.86,666.34 1054.86,691.34 1049.86,696.34 1041.38,696.34 1036.38,691.34 1036.38,679.59 1033.38,676.59 1012.41,676.59 1008.38,680.62 1008.38,686.31 1012.41,690.34 1019.38,690.34 1024.38,695.34 1024.38,703.34 1019.38,708.34 1011.56,708.34 1007.56,712.34 1007.56,729.02 1020.88,742.34 1020.88,757.84 1069.87,806.83 1069.87,835.36 1074.12,839.61 1080.13,839.61 1084.38,843.86 1084.38,849.86 1080.13,854.11 1074.12,854.11 1069.87,858.36 1069.87,864.36 1074.12,868.61 1080.13,868.61 1084.38,872.86 1084.38,878.86 1080.13,883.11 1074.12,883.11 1069.87,887.36 1069.87,893.36 1074.12,897.61 1080.13,897.61 1084.38,901.86 1084.38,907.86 1080.13,912.11 1074.12,912.11 1069.87,916.36 1069.87,981.34 1074.87,986.34 1079.38,986.34 1084.38,991.34 1084.38,996.34 1079.38,1001.34 1073.19,1001.34 1069.38,1005.15 1069.38,1010.53 1073.19,1014.34 1116.38,1014.34 1121.38,1019.34 1121.38,1024.34 1116.38,1029.34 1105.9,1029.34 1102.38,1032.86 1102.38,1037.82 1105.9,1041.34 1118.11,1041.34 1121.38,1044.61 1121.38,1049.23 1118.11,1052.5 1110.38,1052.5 1107.62,1055.26 v1(1107.62,1066.63)
  Signal Layer 2 w4.5: v1(771.45,341.09) 818.63,341.09 828.38,331.34 847.29,331.34 860.29,344.34 899.38,344.34 911.38,332.34 937.38,332.34 949.16,344.12 967.6,344.12 976.38,335.34 1000.38,335.34 1006.13,341.09 v1(1051.88,341.09) 1099.38,341.09 1102.63,344.34 1181.38,344.34 1196.38,329.34 1255.29,329.34 1275.29,349.34 1311.88,349.34 1320.13,341.09 v1(1338.38,341.09)
  Bottom Layer w4.7: v1(771.45,341.09) 804.81,341.09 814.45,350.74 814.45,376.41 845.65,407.61 U7.N3@846.44,407.62 ; v1(1338.38,341.09) 1372.86,341.09 1380.73,348.96 1380.73,375.08 1381.61,375.95 1406.7,401.04 1406.8,401.04 U9.N3@1413.37,407.62
DRAM_A1: U3.AB14 U7.P7 U8.P7 U9.P7 U10.P7 | length 2428.4
  Top Layer w4.7: v1(798.45,295.04) 815.5,312.09 815.5,328.77 829.38,342.65 829.38,351.34 837.83,359.79 855.83,359.79 862.38,366.34 862.38,374.14 860.41,376.11 U8.P7@846.43,376.12 ; U3.AB14@1091.88,1113.88 v1(1107.62,1098.13) ; v1(1365.38,295.04) 1382.43,312.09 1382.43,329.39 1400.02,346.98 1400.02,353.5 1405.02,358.5 1423.38,358.5 1428.38,363.5 1428.38,371.11 1423.38,376.11 U10.P7@1413.36,376.12
  Signal Layer 1 w4.5: v1(1081.88,295.04) 1081.88,304.17 1060.41,325.64 1045.56,325.64 1032.76,312.84 994.28,312.84 933.5,373.61 910.38,373.61 905.38,378.61 905.38,398.84 909.88,403.34 935.38,403.34 940.38,408.34 940.38,416.98 940.43,417.04 940.43,429.67 940.38,429.73 940.38,433.61 935.38,438.61 919.11,438.61 915.93,441.79 915.93,463.86 957.53,505.46 957.53,534.49 989.63,566.59 989.63,598.59 998.88,607.84 998.88,735.84 1012.38,749.34 1012.38,765.34 1053.38,806.34 1053.38,984.34 1048.38,989.34 1030.77,989.34 1026.38,993.73 1026.38,999.95 1030.77,1004.34 1049.99,1004.34 1054.38,1008.73 1054.38,1014.95 1049.99,1019.34 1032.38,1019.34 1027.38,1024.34 1027.38,1042.31 1036.45,1051.38 1070.38,1051.38 1075.38,1046.38 1075.38,1030.34 1080.38,1025.34 1086.38,1025.34 1091.38,1030.34 1091.38,1062.34 1086.38,1067.34 1072.18,1067.34 1067.38,1072.14 1067.38,1078.93 1072.18,1083.73 1093.23,1083.73 v1(1107.62,1098.13)
  Signal Layer 2 w4.5: v1(798.45,295.04) 886.18,295.04 909.83,271.39 920.77,271.39 944.42,295.04 v1(1081.88,295.04) 1114.38,295.04 1118.08,291.34 1197.38,291.34 1208.38,302.34 1246.38,302.34 1266.38,282.34 1292.38,282.34 1305.08,295.04 v1(1365.38,295.04)
  Bottom Layer w4.7: U7.P7@720.46,376.12 735.45,361.12 735.45,341.88 751.78,325.55 751.78,305.35 762.09,295.04 v1(798.45,295.04) ; U9.P7@1287.39,376.12 1302.38,361.12 1302.38,341.88 1318.71,325.55 1318.71,305.35 1329.02,295.04 v1(1365.38,295.04)
DRAM_A2: U3.AA14 U7.P3 U8.P3 U9.P3 U10.P3 | length 2485.7
  Top Layer w4.7: U8.P3@720.45,376.12 733.81,362.76 733.81,343.54 751.21,326.13 751.21,272.34 756.21,267.34 763.45,267.34 768.45,272.34 v1(768.45,279.69) ; U3.AA14@1091.88,1145.37 v1(1107.62,1129.62) ; U10.P3@1287.38,376.12 1300.74,362.76 1300.74,344.68 1318.14,327.28 1318.14,271.34 1323.14,266.34 1330.38,266.34 1335.38,271.34 v1(1335.38,279.69)
  Signal Layer 1 w4.5: 971.85,684.99 971.85,622.01 940.37,590.53 940.37,574.77 931.44,565.84 914.38,565.84 909.38,560.84 909.38,505.34 904.38,500.34 866.38,500.34 861.38,495.34 861.38,279.34 900.38,240.34 991.03,240.34 1030.38,279.69 v1(1051.88,279.69) ; 971.87,685.01 971.87,729.14 ; 971.85,729.15 971.85,765.31 980.88,774.34 980.88,937.84 1001.28,958.24 1001.28,972.01 997.89,975.4 997.89,1104.45 1006.82,1113.38 1064.42,1113.38 1080.66,1129.62 v1(1107.62,1129.62)
  Signal Layer 2 w4.5: v1(768.45,279.69) 884.03,279.69 902.33,261.39 924.83,261.39 949.83,286.39 961.2,286.39 967.9,279.69 v1(1051.88,279.69) 1164.54,279.69 1186.38,257.85 1255.87,257.85 1262.33,251.39 1284.83,251.39 1313.14,279.69 v1(1335.38,279.69)
  Bottom Layer w4.7: v1(768.45,279.69) 804.81,279.69 815.69,290.57 815.69,327.37 833.09,344.77 833.09,362.76 U7.P3@846.44,376.12 ; v1(1335.38,279.69) 1371.74,279.69 1382.62,290.57 1382.62,325.86 1400.02,343.26 1400.02,362.76 U9.P3@1413.37,376.12
DRAM_A3: U3.Y14 U7.N2 U8.N2 U9.N2 U10.N2 | length 2482.6
  Top Layer w4.7: U8.N2@688.95,407.62 704.23,392.34 724.38,392.34 743.38,373.34 743.38,347.41 765.05,325.74 v1(791.45,325.74) ; U3.Y14@1091.88,1176.87 v1(1107.62,1161.12) ; U10.N2@1255.88,407.62 1271.16,392.34 1291.31,392.34 1310.31,373.34 1310.31,347.41 1331.98,325.74 v1(1358.38,325.74)
  Signal Layer 1 w4.5: v1(1081.88,325.74) 1067.13,340.49 1067.13,347.41 1058.2,356.34 1057.58,356.34 1057.38,356.54 1045.56,356.54 1036.38,365.72 1036.38,422.15 1016.71,441.83 1016.71,508.7 1010.13,515.28 1010.13,593.07 1018.4,601.34 1018.4,611.36 1024.38,617.34 1055.38,617.34 1063.88,625.84 1063.88,700.84 1058.38,706.34 1035.38,706.34 1029.38,712.34 1029.38,754.28 1073.4,798.29 1089.38,814.27 1089.38,828.34 1100.38,839.34 1100.38,854.34 1093.13,861.59 1093.13,921.59 1078.38,936.34 1078.38,970.34 1090.38,982.34 1113.38,982.34 1118.38,987.34 1118.38,993.64 1113.38,998.64 v1(1108.13,998.64)
  Signal Layer 2 w4.5: v1(791.45,325.74) 816.98,325.74 825.38,317.34 868.33,317.34 877.38,326.39 902.33,326.39 907.38,321.34 942.64,321.34 950.36,313.62 977.66,313.62 989.78,325.74 v1(1081.88,325.74) 1099.78,325.74 1109.88,335.84 1174.88,335.84 1190.38,320.34 1253.39,320.34 1263.39,310.34 1273.79,310.34 1297.33,333.89 1306.83,333.89 1314.98,325.74 v1(1358.38,325.74)
  Bottom Layer w4.7: v1(791.45,325.74) 791.45,318.34 795.45,314.34 802.99,314.34 806.99,318.34 806.99,330.97 824.39,348.37 824.39,373.35 843.38,392.34 862.67,392.34 U7.N2@877.94,407.62 ; v1(1107.62,1161.12) 1122.97,1176.47 1177.25,1176.47 1186.76,1166.96 1186.76,1118.34 1181.9,1113.48 1159.47,1113.48 1154.47,1108.48 1154.47,1091.77 1154.38,1091.68 1154.38,1086.34 1158.74,1081.98 1182.38,1081.98 1186.76,1077.6 1186.76,1055.66 1182.38,1051.28 1158.38,1051.28 1153.38,1046.28 1153.38,1009.34 1142.68,998.64 v1(1108.13,998.64) ; v1(1358.38,325.74) 1358.38,318.34 1362.38,314.34 1369.92,314.34 1373.92,318.34 1373.92,329.47 1390.31,345.86 1390.31,372.34 1410.31,392.34 1429.6,392.34 U9.N2@1444.87,407.62
DRAM_A4: U3.W14 U7.P8 U8.P8 U9.P8 U10.P8 | length 2741.1
  Top Layer w4.7: v1(798.45,233.64) 798.45,225.34 803.45,220.34 810.68,220.34 815.68,225.34 815.68,227.64 827.15,239.11 828.09,239.11 833.09,244.11 833.09,320.98 840.45,328.34 852.17,328.34 861.31,337.48 861.31,348.27 877.94,364.9 U8.P8@877.93,376.12 ; U3.W14@1091.88,1208.36 v1(1107.62,1192.62) ; v1(1365.38,233.64) 1365.38,223.34 1370.38,218.34 1378.58,218.34 1383.58,223.34 1383.58,226.74 1399.83,242.99 1399.83,320.79 1407.38,328.34 1419.1,328.34 1428.24,337.48 1428.24,348.2 1444.87,364.83 U10.P8@1444.86,376.12
  Signal Layer 2 w4.5: v1(798.45,233.64) 877.08,233.64 897.38,213.34 928.38,213.34 936.38,205.34 961.38,205.34 984.38,228.34 1003.38,228.34 1008.68,233.64 v1(1081.88,233.64) 1131.11,233.64 1132.06,234.59 1158.13,234.59 1186.38,206.34 1286.38,206.34 1313.68,233.64 v1(1365.38,233.64)
  Bottom Layer w4.7: U7.P8@688.96,376.12 705.45,359.62 705.45,336.34 713.45,328.34 724.37,328.34 734.38,318.33 734.38,290.07 734.24,289.93 734.24,261.55 753.1,242.69 753.1,242.63 762.09,233.64 v1(798.45,233.64) ; 1063.68,1050.09 1063.98,1049.79 1063.98,1049.09 1067.98,1045.09 1067.98,1024.48 1063.68,1020.18 1063.38,1019.87 1063.38,940.34 1091.03,912.69 1091.03,901.69 1099.73,892.99 1106.7,892.99 1115.38,884.32 1115.38,867.34 1125.97,856.75 1125.97,478.67 1131.48,473.17 1132.04,472.61 1132.04,454.9 ; 1063.68,1050.1 1063.38,1050.4 1063.38,1075.34 1056.74,1081.98 1036.74,1081.98 1029.28,1089.44 1029.28,1109.44 1025.24,1113.48 1004.24,1113.48 997.38,1120.34 997.38,1139.97 1002.38,1144.97 1022.01,1144.97 1029.28,1152.24 1029.28,1171.47 1034.28,1176.47 1050.99,1176.47 1068.17,1159.29 1077.33,1159.29 1090.05,1172 1096.79,1172 1101.26,1176.47 1101.76,1176.47 1107.62,1182.34 v1(1107.62,1192.62) ; v1(1081.88,233.64) 1109.68,233.64 1124.38,248.34 1132.38,248.34 1137.38,253.34 1137.38,276.34 1132.38,281.34 1110.93,281.34 1105.93,286.34 1105.93,343.89 1112.38,350.34 1120.38,350.34 1126.38,356.34 1126.38,405.11 1132.03,410.76 1132.03,454.89 ; U9.P8@1255.89,376.12 1272.38,359.62 1272.38,336.34 1280.38,328.34 1291.06,328.34 1301.31,318.09 1301.31,290.07 1301.17,289.93 1301.17,261.55 1320.03,242.69 1320.03,242.63 1329.02,233.64 v1(1365.38,233.64)
DRAM_A5: U3.AE13 U7.P2 U8.P2 U9.P2 U10.P2 | length 2814.6
  Top Layer w4.7: U8.P2@688.95,376.12 699.45,376.11 704.45,371.11 704.45,337.34 711.45,330.34 722.38,330.34 733.81,318.91 733.81,231.04 738.81,226.04 741.68,226.04 749.54,218.18 749.54,211.34 754.54,206.34 763.45,206.34 768.45,211.34 v1(768.45,218.29) ; v1(1020.88,810.64) 1038.13,827.89 1038.13,997.14 U3.AE13@1060.38,1019.39 ; U10.P2@1255.88,376.12 1266.38,376.11 1271.38,371.11 1271.38,337.34 1278.38,330.34 1289.05,330.34 1300.74,318.65 1300.74,228.29 1316.01,213.02 1316.01,212.34 1321.01,207.34 1330.38,207.34 1335.38,212.34 v1(1335.38,218.29)
  Signal Layer 2 w4.5: v1(768.45,218.29) 873.43,218.29 900.33,191.39 960.43,191.39 987.33,218.29 v1(1051.88,218.29) 1108.38,218.29 1132.33,194.34 1290.38,194.34 1314.33,218.29 v1(1335.38,218.29)
  Bottom Layer w4.7: v1(768.45,218.29) 806.23,218.29 833.09,245.16 833.09,318.12 833.09,318.65 840.91,326.48 849.51,326.48 861.45,338.41 861.45,359.62 U7.P2@877.94,376.12 ; v1(1020.88,810.64) 1006.38,796.14 1006.38,736.34 1000.38,730.34 990.38,730.34 981.48,721.44 981.48,576.83 955.54,550.88 955.54,482.19 964.38,473.34 971.38,473.34 975.38,469.34 975.38,430.34 1024.38,381.34 1024.38,310.34 1010.68,296.64 983.68,296.64 972.03,284.99 972.03,209.34 967.03,204.34 937.38,204.34 927.38,194.34 927.38,115.34 936.38,106.34 974.38,106.34 981.38,113.34 981.38,174.34 991.38,184.34 1005.38,184.34 1010.38,189.34 1010.38,209.34 1019.33,218.29 v1(1051.88,218.29) ; v1(1335.38,218.29) 1373.16,218.29 1400.02,245.16 1400.02,318.65 1407.84,326.48 1414.51,326.48 1428.38,340.34 1428.38,359.62 U9.P2@1444.87,376.12
DRAM_A6: U3.AC13 U7.R8 U8.R8 U9.R8 U10.R8 | length 2815.1
  Top Layer w4.7: v1(798.45,172.24) 848.35,172.24 861.45,185.34 861.45,317.34 877.94,333.83 U8.R8@877.93,344.63 ; v1(1044.63,1066.63) U3.AC13@1060.38,1082.38 ; v1(1365.38,172.24) 1416.38,172.24 1428.38,184.24 1428.38,317.34 1444.87,333.83 U10.R8@1444.86,344.63
  Signal Layer 2 w4.5: v1(798.45,172.24) 865.48,172.24 891.33,146.39 1012.53,146.39 1038.38,172.24 v1(1081.88,172.24) 1100.38,172.24 1124.28,148.34 1295.38,148.34 1319.28,172.24 v1(1365.38,172.24)
  Bottom Layer w4.7: U7.R8@688.96,344.63 688.96,335.83 705.24,319.55 705.24,301.39 711.76,294.87 711.76,274.1 711.87,273.99 711.87,221.92 761.55,172.24 v1(798.45,172.24) ; v1(1044.63,1066.63) 1037.38,1059.38 1037.38,1049.6 1029.28,1041.5 1029.28,1028.78 1037.38,1020.68 1037.38,1002.34 1040.38,999.34 1052.38,999.34 1054.38,997.34 1054.38,970.34 1050.38,966.34 1044.38,966.34 1039.38,961.34 1039.38,956.34 1043.38,952.34 1049.38,952.34 1054.38,947.34 1054.38,933.58 1072.93,915.03 1076.08,911.87 1082.33,905.61 1082.33,898.08 1097.38,883.03 1097.38,864.34 1106.38,855.34 1112.38,855.34 1117.27,850.45 1117.27,663.72 1113.27,659.72 1088.38,659.72 1084.38,655.72 1084.38,648.74 1088.38,644.74 1111.38,644.74 1115.38,640.74 1115.38,634.65 1111.38,630.65 1082.38,630.65 1078.78,627.05 1078.78,619.55 1082.38,615.95 1111.38,615.95 1115.38,611.95 1115.38,605.25 1111.38,601.25 1087.38,601.25 1083.38,597.25 1083.38,590.55 1087.38,586.55 1112.38,586.55 1117.27,581.66 1117.27,475.06 1122.78,469.56 1123.33,469.01 1123.33,415.53 1117.68,409.88 1117.68,368.34 1112.68,363.34 1102.38,363.34 1097.38,358.34 1097.38,350.23 1093.38,346.23 1093.38,335.95 1097.23,332.1 1097.23,319.38 1091.38,313.53 1091.38,307.25 1097.23,301.4 1097.23,288.68 1090.38,281.83 1090.38,277.55 1097.23,270.7 1097.23,255.19 1091.03,248.99 1072.03,248.99 1066.38,243.34 1066.38,224.34 1072.43,218.29 1090.43,218.29 1098.38,210.34 1098.38,177.34 1093.28,172.24 v1(1081.88,172.24) ; U9.R8@1255.89,344.63 1255.89,335.83 1272.17,319.55 1272.17,228.55 1328.48,172.24 v1(1365.38,172.24)
DRAM_A7: U3.Y13 U7.R2 U8.R2 U9.R2 U10.R2 | length 2917.1
  Top Layer w4.7: U8.R2@688.95,344.63 682.38,344.62 677.38,339.62 677.38,333.58 682.38,328.58 697.31,328.58 702.31,323.58 702.31,307.59 697.66,302.94 697.66,210.05 750.84,156.89 v1(768.45,156.89) ; v1(1044.63,1161.12) U3.Y13@1060.38,1176.87 ; U10.R2@1255.88,344.63 1248.38,344.62 1243.38,339.62 1243.38,331.47 1248.37,326.48 1261.41,326.48 1269.24,318.65 1269.24,307.59 1264.59,302.94 1264.59,208.13 1315.83,156.89 v1(1335.38,156.89)
  Signal Layer 2 w4.5: v1(768.45,156.89) 862.83,156.89 886.38,133.34 1014.83,133.34 1038.38,156.89 v1(1051.88,156.89) 1099.38,156.89 1124.88,131.39 1294.33,131.39 1301.88,135.84 1318.88,152.84 v1(1335.38,156.89)
  Bottom Layer w4.7: v1(768.45,156.89) 809,156.89 861.45,209.34 861.45,326.1 870.15,334.8 870.15,336.83 U7.R2@877.94,344.63 ; v1(1044.63,1161.12) 1048.6,1161.12 1090.38,1119.34 1090.38,1060.31 1094.78,1055.91 1094.78,1014.36 1094.08,1013.66 1090.38,1009.95 1090.38,989.05 1142.38,937.05 1142.38,883.65 1152.07,873.96 1152.07,489.5 1157.58,484 1158.14,483.44 1158.14,444.07 1158.13,399.95 1152.48,394.3 1152.48,355.24 1166.68,341.04 1166.68,169.64 1107.38,110.34 1044.38,110.34 1031.38,123.34 1031.38,136.34 v1@1051.88,156.84 ; v1(1335.38,156.89) 1375.93,156.89 1428.38,209.34 1428.38,328.03 1437.08,336.73 1437.08,336.83 U9.R2@1444.87,344.63
DRAM_A8: U3.AB13 U7.T8 U8.T8 U9.T8 U10.T8 | length 2809.3
  Top Layer w4.7: v1(798.45,141.54) 853.14,141.54 877.94,166.34 U8.T8@877.93,313.13 ; v1(1044.63,1098.13) U3.AB13@1060.38,1113.88 ; v1(1365.38,141.54) 1422.58,141.54 1444.87,163.83 U10.T8@1444.86,313.13
  Signal Layer 2 w4.5: v1(798.45,141.54) 858.38,141.54 886.58,113.34 1009.18,113.34 1037.48,141.64 1081.78,141.64 v1(1081.88,141.54) 1098.38,141.54 1121.58,118.34 1304.38,118.34 1327.58,141.54 v1(1365.38,141.54)
  Bottom Layer w4.7: U7.T8@688.96,313.13 688.96,284.29 701.87,271.39 701.87,200.92 761.25,141.54 v1(798.45,141.54) ; v1(1044.63,1098.13) 1058.49,1098.13 1064.38,1092.24 1064.38,1087.34 1072.38,1079.34 1072.38,1053.7 1072.68,1053.4 1072.68,1052.7 1076.68,1048.7 1076.68,1020.87 1072.38,1016.57 1072.38,955.34 1074.38,953.34 1080.38,953.34 1086.51,959.47 1094.88,959.47 1100.38,953.97 1100.38,947.34 1089.75,936.71 1089.75,929.97 1094.51,925.21 1101.25,925.21 1110.38,934.34 1119.38,934.34 1124.38,929.34 1124.38,873.34 1134.67,863.05 1134.67,482.28 1140.18,476.78 1140.74,476.22 1140.74,451.29 1140.73,407.15 1135.08,401.5 1135.08,343.04 1130.38,338.34 1120.68,338.34 1116.38,334.04 1116.38,298.34 1122.38,292.34 1142.68,292.34 1148.68,286.34 1148.68,242.64 1142.38,236.34 1126.38,236.34 1121.38,231.34 1121.38,222.88 1117.38,218.88 1117.38,204.7 1122.38,199.7 1131.09,199.7 1135.38,203.99 1144.03,203.99 1148.68,199.34 1148.68,183.64 1126.38,161.34 1105.42,161.34 1098.42,154.34 1098.42,145.8 1102.38,141.84 1102.38,137.34 1097.38,132.34 1091.08,132.34 v1(1081.88,141.54) ; U9.T8@1255.89,313.13 1255.89,213.83 1328.18,141.54 v1(1365.38,141.54)
DRAM_A9: U3.AE12 U7.R3 U8.R3 U9.R3 U10.R3 | length 2511.9
  Top Layer w4.7: U8.R3@720.45,344.63 720.46,344.33 725.75,339.04 725.99,339.04 742.51,322.52 742.51,240.34 747.51,235.34 763.45,235.34 768.45,240.34 v1(768.45,248.99) ; v1(1022.58,885.69) 1028.88,891.99 U3.AE12@1028.88,1019.39 ; U10.R3@1287.39,344.33 1288.78,344.33 1309.44,323.68 1309.44,240.34 1314.44,235.34 1330.38,235.34 1335.38,240.34 v1(1335.38,248.99)
  Signal Layer 2 w4.5: v1(768.45,248.99) 880.73,248.99 905.83,223.89 931.93,223.89 945.38,237.34 995.38,237.34 1007.03,248.99 v1(1051.88,248.99) 1162.73,248.99 1174.38,237.34 1238.88,237.34 1252.33,223.89 1286.93,223.89 1312.03,248.99 v1(1335.38,248.99)
  Bottom Layer w4.7: v1(768.45,248.99) 813.22,248.99 824.39,260.16 824.39,322.57 U7.R3@846.44,344.63 ; v1(1022.58,885.69) 1022.58,902.05 992.68,931.95 992.68,945.34 987.68,950.34 981.38,950.34 974.88,943.84 974.88,845.54 966.38,837.04 966.38,753.34 971.38,748.34 986.38,748.34 991.38,753.34 991.38,816.34 1001.03,825.99 1027.24,825.99 1036.23,817 1036.23,804.28 1027.24,795.29 1019.08,795.29 1015.08,791.29 1015.08,732.73 1003.99,721.64 996.38,721.64 991.38,716.64 991.38,570.98 967.35,546.95 967.35,492.38 984.08,475.64 984.08,438.94 1015.08,407.94 1015.08,403.34 1033.38,385.04 1033.38,305.34 999.38,271.34 999.38,244.34 1010.38,233.34 1046.38,233.34 1051.88,238.84 v1(1051.88,248.99) ; v1(1335.38,248.99) 1380.15,248.99 1391.32,260.16 1391.32,322.26 1411.93,342.87 U9.R3@1413.37,342.87